# Altium PCB 1.PcbDoc
Units mm, origin at the board's own origin, x right, y up, seen from the top; angles counter-clockwise.
Board outline 161.25 x 84.75 mm, 2 copper layers (Top Layer, Bottom Layer); 59 components, 58 nets, 272 pads, 78 vias.
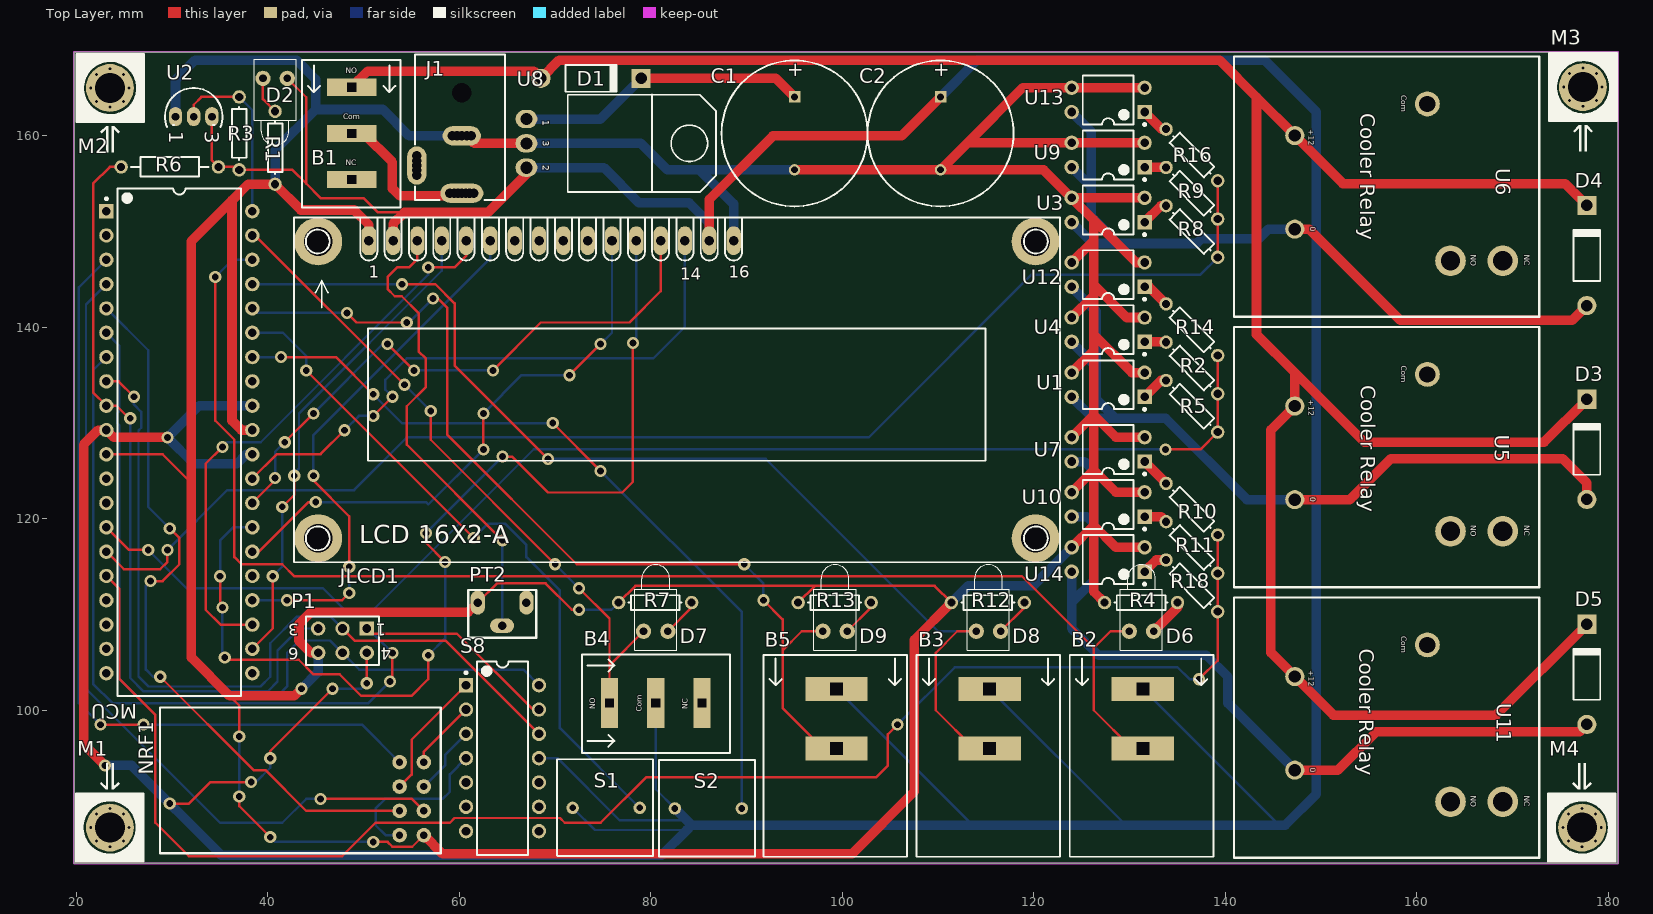
[diagram p0: Top Layer view]
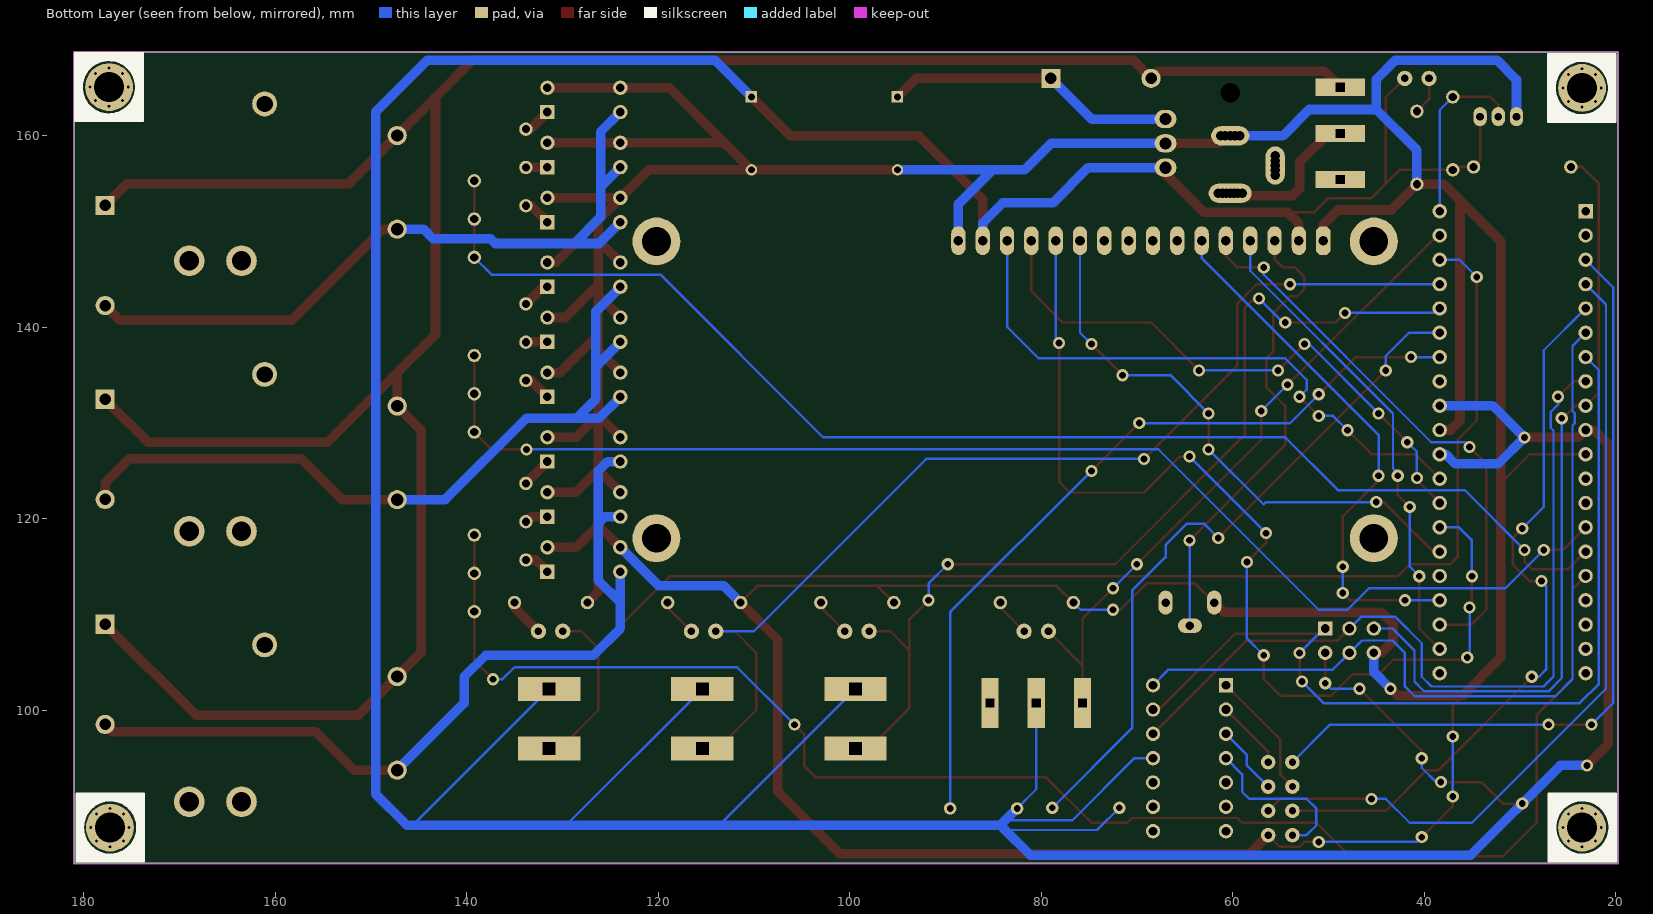
[diagram p1: Bottom Layer view, seen from below]

## Layer stack, top to bottom
Top Solder: solder mask 0.0102, Solder Resist, Dk 3.5
Top Layer: signal copper 0.0356
Dielectric 1: dielectric 0.32, FR-4, Dk 4.8
Bottom Layer: signal copper 0.0356
Bottom Solder: solder mask 0.0102, Solder Resist, Dk 3.5

## Board outline
19.75,84 19.75,168.75 181,168.75 181,84

## Design rules (kind name [scope] priority, off if disabled: settings)
Clearance [All] p1: gap=0.254 ignorepadtopadclearanceinfootprint=FALSE except(0: Arc-Hole Track-Hole SMDPad-Hole THPad-Hole Via-Hole Fill-Hole Poly-Hole Region-Hole Text-Hole)
PolygonConnect [All] p1: connectstyle=Relief reliefconductorwidth=0.254 reliefentries=4 polygonreliefangle="90 Angle" airgapwidth=0.254
RoutingVias [All] p1: holewidth=0.711 width=1.27 viastyle="Through Hole" minholewidth=0.711 minwidth=1.27 maxholewidth=0.711 maxwidth=1.27
SolderMaskExpansion [All] p1: expansion=0.102
Width [All] p1: maxlimit=1 minlimit=0.254 preferedwidth=0.254
30 further rules are at their usual default settings.

## Components (designator, comment, footprint, x,y, rotation, side; value= is the part's Value field where it differs from the comment)
B1 "Small Cooler Button" "Small cooler button" 48.877,161.774 r270 top
B2 "Cooler Button" "PCBComponent_1 - duplicate" 131.25,95.25 r270 top
B3 "Cooler Button" "PCBComponent_1 - duplicate" 115.25,95.25 r270 top
B4 "Small Cooler Button" "Small cooler button" 78.976,100.877 r0 top
B5 "Cooler Button" "PCBComponent_1 - duplicate" 99.25,95.25 r270 top
C1 "Cap Pol1" RB7.6-15 95,160.25 r90 top value=1mF
C2 "Cap Pol1" RB7.6-15 110.25,160.25 r90 top value=100uF
D1 "Diode 1N4004" DO-41 73.75,166 r0 top
D2 "LED1" LED-1 40.75,166 r270 top
D3 "Diode 1N4004" DO-41 177.75,127.25 r90 top
D4 "Diode 1N4004" DO-41 177.75,147.5 r90 top
D5 "Diode 1N4004" DO-41 177.75,103.75 r90 top
D6 "LED1" LED-1 131.23,108.25 r90 top
D7 "LED1" LED-1 80.5,108.25 r90 top
D8 "LED1" LED-1 115.25,108.25 r90 top
D9 "LED1" LED-1 99.23,108.25 r90 top
J1 "Power Jack" "Power Jack" 60.25,168.5 r270 top
JLCD1 "LCD2X16_Alphanumeric" LCD_2X16 80,132.75 r0 top
M1 "Screw" "Board Screw" 23.5,87.75 r180 top
M2 "Screw" "Board Screw" 23.5,165 r0 top
M3 "Screw" "Board Screw" 177.336,165.086 r0 top
M4 "Screw" "Board Screw" 177.25,87.75 r180 top
MCU "DIP Package" 40P6 30.75,128 r0 top
NRF1 "NRF24L01" PCBComponent_1#1 56.29,94.58 r0 top
P1 "Header 3X2A" HDR2X3_CEN 50.33,108.54 r180 top
PT2 "POT2" POT2 60.904,107.567 r0 top
R1 "Res1" AXIAL-0.3 40.75,158.75 r270 top value=1K
R2 "Res1" AXIAL-0.3 136.5,135.75 r135 top value=100
R3 "Res1" AXIAL-0.3 37,160.25 r90 top value=4.7K
R4 "Res1" AXIAL-0.3 131.19,111.25 r180 top value=1K
R5 "Res1" AXIAL-0.3 136.5,131.75 r135 top value=100
R6 "Res2" AXIAL-0.4 29.75,156.75 r180 top value=10K
R7 "Res1" AXIAL-0.3 80.44,111.25 r180 top value=1K
R8 "Res1" AXIAL-0.3 136.5,150 r135 top value=100
R9 "Res1" AXIAL-0.3 136.5,154 r135 top value=100
R10 "Res1" AXIAL-0.3 136.5,121 r135 top value=100
R11 "Res1" AXIAL-0.3 136.5,117 r135 top value=100
R12 "Res1" AXIAL-0.3 115.19,111.25 r180 top value=1K
R13 "Res1" AXIAL-0.3 99.19,111.25 r180 top value=1K
R14 "Res1" AXIAL-0.3 136.5,139.75 r135 top value=100
R16 "Res1" AXIAL-0.3 136.5,158 r135 top value=100
R18 "Res1" AXIAL-0.3 136.5,113 r135 top value=100
S1 "PushButton_2PIN" PushButton_2PIN 74.5,90 r0 top
S2 "PushButton_2PIN" PushButton_2PIN 85.167,89.94 r0 top
S8 "SW DIP-7" DIP-14 64.5,95 r0 top
U1 "Optoisolator1" DIP-4 127.75,134 r180 top
U2 "DS1820" DS1820 32.25,162 r270 top
U3 "Optoisolator1" DIP-4 127.75,152.25 r180 top
U4 "Optoisolator1" DIP-4 127.75,139.75 r180 top
U5 "Relay Cooler" PCBComponent_1#2 158.934,126.699 r270 top
U6 "Relay Cooler" PCBComponent_1#2 158.934,154.949 r270 top
U7 "Optoisolator1" DIP-4 127.75,127.25 r180 top
U8 "L7805CV" "78XXCV - Right" 67,159.21 r270 top
U9 "Optoisolator1" DIP-4 127.75,158 r180 top
U10 "Optoisolator1" DIP-4 127.75,121.5 r180 top
U11 "Relay Cooler" PCBComponent_1#2 158.934,98.449 r270 top
U12 "Optoisolator1" DIP-4 127.75,145.5 r180 top
U13 "Optoisolator1" DIP-4 127.75,163.75 r180 top
U14 "Optoisolator1" DIP-4 127.75,115.75 r180 top

## Footprints (in the part's own frame and the unit in brackets; to place one, negate y for a bottom-side part, rotate by r counter-clockwise, add the part's x,y. Pads: shape width x height; smd on the part's side, far side on the other; paste and mask are expansions set on the pad)
40P6 [mm] "40-Pin Ceramic Dual In-Line Package (CerDIP)"
  rect 1.5x1.5 hole 0.9: 1(-7.62,24.13)
  round 1.5 hole 0.9: 2(-7.62,21.59) 3(-7.62,19.05) 4(-7.62,16.51) 5(-7.62,13.97) 6(-7.62,11.43) 7(-7.62,8.89) 8(-7.62,6.35) 9(-7.62,3.81) 10(-7.62,1.27) 11(-7.62,-1.27) 12(-7.62,-3.81) 13(-7.62,-6.35) 14(-7.62,-8.89) 15(-7.62,-11.43) 16(-7.62,-13.97) 17(-7.62,-16.51) 18(-7.62,-19.05) 19(-7.62,-21.59) 20(-7.62,-24.13) 21(7.62,-24.13) 22(7.62,-21.59) 23(7.62,-19.05) 24(7.62,-16.51) 25(7.62,-13.97) 26(7.62,-11.43) 27(7.62,-8.89) 28(7.62,-6.35) 29(7.62,-3.81) 30(7.62,-1.27) 31(7.62,1.27) 32(7.62,3.81) 33(7.62,6.35) 34(7.62,8.89) 35(7.62,11.43) 36(7.62,13.97) 37(7.62,16.51) 38(7.62,19.05) 39(7.62,21.59) 40(7.62,24.13)
  silkscreen extent -7.74,-26.5 6.45,26.5, body extent -7.05,-26.47 7.05,26.47, height 4.83
"78XXCV - Right" [mil] "Right Angle"
  oval 75x90 hole 50: 1(-100,0) 2(100,0) 3(0,0)
  silkscreen extent -201,170 200,780, body extent -198,-8 202,776, height 175
AXIAL-0.3 [mm] "Axial Device, Thru-Hole; 2 Leads; 0.3 in Pin Spacing"
  round 1.4 hole 0.85: 1(-3.81,0) 2(3.81,0)
  silkscreen extent -2.77,-0.76 2.77,0.76
AXIAL-0.4 [mm] "Axial Device, Thru-Hole; 2 Leads; 0.4 in Pin Spacing"
  round 1.4 hole 0.85: 1(-5.08,0) 2(5.08,0)
  silkscreen extent -4.06,-1.02 4.06,1.02
"Board Screw" [mm]
  round 0.6 hole 0.3: S(-2,0) S(-1.414,1.414) S(-1.414,-1.414) S(0,2) S(0,-2) S(1.414,1.414) S(1.414,-1.414) S(2,0)
  round 5 hole 3.15 mask+0.1: S(0,0)
  silkscreen extent -3.49,-6.75 3.56,3.52
DIP-4 [mm] "DIP; 4 Leads; Row Spacing 7.62 mm; Pitch 2.54 mm"
  rect 1.5x1.5 hole 0.9: 1(-3.81,1.27)
  round 1.5 hole 0.9: 2(-3.81,-1.27) 3(3.81,-1.27) 4(3.81,1.27)
  silkscreen extent -3.94,-2.55 2.65,2.69, body extent -3.15,-2.5 3.15,2.5, height 5.6
DIP-14 [mm] "DIP; 14 Leads; Row Spacing 7.62 mm; Pitch 2.54 mm"
  rect 1.5x1.5 hole 0.9: 1(-3.81,7.62)
  round 1.5 hole 0.9: 2(-3.81,5.08) 3(-3.81,2.54) 4(-3.81,0) 5(-3.81,-2.54) 6(-3.81,-5.08) 7(-3.81,-7.62) 8(3.81,-7.62) 9(3.81,-5.08) 10(3.81,-2.54) 11(3.81,0) 12(3.81,2.54) 13(3.81,5.08) 14(3.81,7.62)
  silkscreen extent -3.93,-10.1 2.65,10.1, body extent -3.6,-10.1 3.6,10.1, height 5.08
DO-41 [mm] "Diode, Axial; Body 5.2 x 2.7 mm (LxDia. max), Lead Dia. 0.86 mm (max)"
  round 2 hole 1.2: 1(-5.23,0)
  rect 2x2 hole 1.2: 2(5.23,0)
  silkscreen extent -2.65,-1.4 2.75,1.4
DS1820 [mm]
  oval 2x1.4 hole 0.8: 1(0,-1.905) 2(0,0) 3(0,1.905)
  silkscreen extent -3,-3 1.09,3
HDR2X3_CEN [mm] "Connector; Header; 3x2 Position"
  rect 1.5x1.5 hole 0.9: 1(0,0)
  round 1.5 hole 0.9: 2(2.54,0) 3(5.08,0) 4(0,2.54) 5(2.54,2.54) 6(5.08,2.54)
  silkscreen extent -1.27,-1.27 6.35,3.81
LCD_2X16 [mm] "LCD"
  oct 1.5x3 hole 1: 1(-29.464,16.3)
  oval 1.5x3 hole 1: 2(-26.924,16.3) 3(-24.384,16.3) 4(-21.844,16.3) 5(-19.304,16.3) 6(-16.764,16.3) 7(-14.224,16.3) 8(-11.684,16.3) 9(-9.144,16.3) 10(-6.604,16.3) 11(-4.064,16.3) 12(-1.524,16.3) 13(1.016,16.3) 14(3.556,16.3) 15(6.096,16.3) 16(8.636,16.3)
  round 5 hole 3: ""(-34.756,-14.775) ""(-34.756,16.213) ""(40.174,-14.775) ""(40.174,16.213)
  silkscreen extent -37.3,-17.29 42.7,18.71, body extent -37.35,-17.3 42.65,18.7, height 11.5
LED-1 [mm] "LED; 2 Leads"
  round 1.6 hole 0.8: 1(0,1.27) 2(0,-1.27)
  silkscreen extent -2,-2.2 6.95,2.2
PCBComponent_1#1 [mil]
  round 60 hole 30: CE(0,-200) CSN(-100,-200) GND(0,-300) IRQ(-100,0) MISO(0,0) MOSI(-100,-100) SCK(0,-100) VCC(-100,-300)
  silkscreen extent -1085,-375 70,225, body extent -1082,-365 60,225, height 138
PCBComponent_1#2 [mil]
  round 78.74 hole 51.18: 20(-200,-460) 21(185,-460)
  round 125.98 hole 78.74: 22(315,180) 23(315,395)
  round 102.36 hole 66.93: 24(-330,85)
  silkscreen extent -525,-710 545,546
"PCBComponent_1 - duplicate" [mm]
  rect 2.5x6.5 hole 1.3 square: 25(-0.762,0.127) 26(-6.985,0.127)
  silkscreen extent -10.54,-7.51 10.54,7.49
POT2 [mm]
  oval 1.5x2.5 hole 0.9: 1(1.016,3.683) 2(6.096,3.683)
  oval 2.5x1.5 hole 0.9: 3(3.556,1.27)
  silkscreen extent 0,0 7.11,5
"Power Jack" [mm] "Power Adaptor Jack"
  round 1.5 hole 1: 1(14.5,-1.25) 1(14.5,-0.8) 1(14.5,-0.4) 1(14.5,0.4) 1(14.5,0.8) 1(14.5,1.25) 2(8.5,-1) 2(8.5,1) 2(8.5,-0.5) 2(8.5,0.5) 3(10.6,-4.7) 3(11.1,-4.7) 3(12.1,-4.7) 3(12.6,-4.7)
  oval 2x4.5 hole 1: 1(14.5,0)
  oval 2x4 hole 1: 2(8.5,0)
  oval 4x2 hole 1: 3(11.6,-4.7)
  round 1.9 hole 2: MH(4,0)
  silkscreen extent 0,-4.9 15.2,4.5, body extent 0,-4.9 15.2,4.5, height 11
PushButton_2PIN [mm]
  round 1.3 hole 0.7: 1(-2.667,-0.191) 2(4.333,-0.191)
  silkscreen extent -4.32,-5.22 5.71,4.89
RB7.6-15 [mm] "Polarized Capacitor (Radial); 2 Leads"
  rect 1.2x1.2 hole 0.7: 1(3.81,0)
  round 1.2 hole 0.7: 2(-3.81,0)
  silkscreen extent -7.62,-7.62 7.62,7.62
"Small cooler button" [mm]
  rect 1.8x5.2 hole 0.9 square: 1(1.524,-0.127) 2(6.35,-0.127) 3(-3.302,-0.127)
  silkscreen extent -6.16,-5.35 9.27,4.97

## Part data
B2 B3 B5: "Button"
C1 C2: "Polarized Capacitor (Radial)", LatestRevisionDate=17-Jul-2002, LatestRevisionNote="Re-released for DXP Platform.", PackageDescription="Polarized Capacitor (Radial); 2 Leads", PackageReference=RB7.6-15, Published=8-Jun-2000, Publisher="Altium Limited"
D1 D3 D4 D5: "1 Amp General Purpose Rectifier", Code_JEDEC=DO-204-AL, ComponentLink1Description="Manufacturer Link", ComponentLink1URL=http://www.fairchildsemi.com/, ComponentLink2Description=Datasheet, ComponentLink2URL=http://www.fairchildsemi.com/ds/1N%2F1N4001.pdf, DatasheetVersion=1998, LatestRevisionDate=17-Jul-2002, LatestRevisionNote="Re-released for DXP Platform.", PackageDescription="Diode, Axial; Body 5.2 x 2.7 mm (LxDia. max), Lead Dia. 0.86 mm (max)", PackageReference=DO-41, PackageVersion=Aug-1999, Published=8-Jun-2000, Publisher="Altium Limited"
D2 D6 D7 D8 D9: "Typical RED GaAs LED", LatestRevisionDate=08-Jul-2005, LatestRevisionNote="Mech Layer 1 removed.", PackageDescription="LED; 2 Leads", PackageReference=LED-1, Published=8-Jun-2000, Publisher="Altium Limited"
M1 M2 M3 M4: library part "Board Screw", "Board Screw With Spacer"
MCU: library part ATmega32A-PU, "8-bit AVR Microcontroller, 2.7-5.5V, 16MHz, 32KB Flash, 1KB EEPROM, 2KB SRAM, 40-pin PDIP, Industrial Grade (-40°C to 85°C)", Code_JEDEC=MS-011-AC, ComponentLink1Description="Manufacturer URL", ComponentLink1URL=http://www.atmel.com/, ComponentLink2Description="ATmega32A Datasheet", ComponentLink2URL=http://www.atmel.com/dyn/resources/prod_documents/doc8155.pdf, ComponentLink3Description="ATmega32A Summary", ComponentLink3URL=http://www.atmel.com/dyn/resources/prod_documents/8155S.pdf, DatasheetVersion="revC, Feb-2011", PackageDescription="40-lead (0.600\"/15.24mm Wide) Plastic Dual Inline Package (PDIP)", PackageReference=40P6, PackageVersion="revB, Sep-2001"
P1: "Header, 3-Pin, Dual row", LatestRevisionDate=17-Jul-2002, LatestRevisionNote="Re-released for DXP Platform.", Publisher="Altium Limited"
PT2: "Variable Potentiometer standing", Designer="Seyed Mohsen Ghasemian", WEB=www.picpars.com
R1 R2 R3 R4 R5 R6 R7 R8 R9 R10 R11 R12 R13 R14 R16 R18: "Resistor", LatestRevisionDate=17-Jul-2002, LatestRevisionNote="Re-released for DXP Platform.", Published=8-Jun-2000, Publisher="Altium Limited"
  R1 R2 R3 R4 R5 R7 R8 R9 R10 R11 R12 R13 R14 R16 R18: PackageDescription="Axial Device, Thru-Hole; 2 Leads; 0.3 in Pin Spacing", PackageReference=AXIAL-0.3
  R6: PackageDescription="Axial Device, Thru-Hole; 2 Leads; 0.4 in Pin Spacing", PackageReference=AXIAL-0.4
S8: "DIP Switch, 7 Position, SPST", Code_JEDEC=MO-001-AF, LatestRevisionDate=17-Jul-2002, LatestRevisionNote="Re-released for DXP Platform.", PackageReference=DIP-14, Published=24-Mar-1999, Publisher="Altium Limited"
U1 U3 U4 U7 U9 U10 U12 U13 U14: "4-Pin Phototransistor Optocoupler", DatasheetVersion=Nov-2003, LatestRevisionDate=04-Mar-2005, LatestRevisionNote="Sch pins 3 & 4 Swapped.", PackageReference=DIP-4, Published=24-Mar-1999, Publisher="Altium Limited"
U2: "1-Wire Digital Thermometer", ComponentAvailability=Obsolete, ComponentLink1Description="Manufacturer Link", ComponentLink1URL=http://www.maxim-ic.com/, ComponentLink2Description=Datasheet, ComponentLink2URL=http://pdfserv.maxim-ic.com/en/ds/DS1820-DS1820S.pdf, ComponentLink3Description="Discontinuation Notice", ComponentLink3URL=http://www.maxim-ic.com/qa/pdfs/non-obsolescence-letter.pdf, DatasheetVersion=5-Mar-1998, LatestRevisionDate=17-Jul-2002, LatestRevisionNote="Re-released for DXP Platform.", PackageDescription="TO, Flat Index; 3 In-Line, Axial Leads; Body Dia. 4.6mm; Leads 0.56 x 0.51 mm (max)", PackageReference=PR35, PackageVersion=1999, Published=13-Oct-2000, Publisher="Altium Limited"
U8: library part L78XXCV, "Fixed Voltage Regulator", Adding Date=1387/01/06, Company=ControTec, Designer="Saeid Jorablo"
J1: Adding Date=10/21/2009, Company=Personal, Designer="Saeid Jorablo", Project Name=Laser

## Via types
v1: diameter 1.27, hole 0.711, Top Layer to Bottom Layer, 78 vias

## Nets (pads, with @x,y where several pads share a name; then routed paths per layer and width w, separated by ;. In a path a pad name is that pad's centre, name@x,y a point inside that pad or via, vN(x,y) a via of type N, cw(c..) or ccw(c..) an arc to the next point about the centre after c; other vN are vias at no path point)
12: B1.3 D1.1 D3.2 D4.2 D5.2 U5.20 U6.20 U11.20 | length 272.8
  Top Layer w1: B1.3 50.424,166.75 67.77,166.75 D1.1 70.416,167.896 139.383,167.896 143.25,164.029 ; D5.2 168.27,99.5 151.279,99.5 U11.20 144.75,106.029 144.75,129.279 U5.20 147.25,135.25 ; D3.2 173.27,128 154.5,128 147.25,135.25 ; D4.2 175.48,155 152.279,155 U6.20 143.25,164.029 ; 143.25,164.029 143.25,139.25 147.25,135.25
A1: B4.3 D7.1 MCU.39 | length 69.5
  Top Layer w0.254: MCU.39 38.66,149.59 v1(54.25,134) ; v1(57,131.25) 57,128.25 v1(70,115.25) ; v1(72.5,112.75) 75.674,109.576 75.674,104.694 ; B4.3 75.674,104.694 ; D7.1 75.674,104.694
  Bottom Layer w0.254: v1(54.25,134) v1(57,131.25) ; v1(70,115.25) v1(72.5,112.75)
A2: B2.25 D6.1 MCU.38 | length 146.1
  Top Layer w0.254: v1(34.5,145.25) 34.5,130.25 36.5,128.25 36.5,116 37.25,115.25 41.5,115.25 42.766,113.984 48.921,113.984 48.937,114 118.75,114 126.25,106.5 ; D6.1 128,108.25 126.25,106.5 ; B2.25 130.238,96.012 126.25,100 126.25,106.5
  Bottom Layer w0.254: v1(34.5,145.25) 36.3,147.05 MCU.38
A3: B3.25 D8.1 MCU.37 | length 112.9
  Top Layer w0.254: v1(54,144.5) 57.5,144.5 59.5,142.5 59.5,136 v1(69.25,126.25) ; D8.1 112,108.25 109.75,106 109.75,100 113.738,96.012 B3.25
  Bottom Layer w0.254: MCU.37 38.38,144.5 v1(54,144.5) ; v1(69.25,126.25) 92,126.25 110,108.25 D8.1
A4: B5.25 D9.1 MCU.36 | length 101.4
  Top Layer w0.254: v1(48.25,141.5) 49.25,140.5 v1(54.5,140.5) ; v1(57.25,143) 57.75,143 58.75,142 58.75,128.75 72.25,115.25 v1(89.75,115.25) ; v1(91.75,111.5) 93.75,109.5 93.75,106.25 ; D9.1 95.75,108.25 93.75,106.25 ; B5.25 97.988,96.012 93.75,100.25 93.75,106.25
  Bottom Layer w0.254: MCU.36 38.84,141.5 v1(48.25,141.5) ; v1(54.5,140.5) 54.75,140.5 v1(57.25,143) ; v1(89.75,115.25) 91.75,113.25 v1(91.75,111.5)
A5: MCU.35 S1.2 | length 72.3
  Top Layer w0.254: v1(44,135.5) v1(61.5,118)
  Bottom Layer w0.254: MCU.35 41.57,139.43 44,137 v1(44,135.5) ; v1(61.5,118) 63,119.5 64.75,119.5 67,117.25 67,116 70.5,112.5 70.5,98.143 S1.2
A6: MCU.34 S2.2 | length 82.7
  Top Layer w0.254: v1(41.36,136.89) 47.11,136.89 v1(51,133) ; v1(69.75,130) v1(74.75,125)
  Bottom Layer w0.254: MCU.34 v1(41.36,136.89) ; v1(51,133) 54.016,129.984 69.734,129.984 v1(69.75,130) ; v1(74.75,125) 89.5,110.25 S2.2
A7: MCU.33
B2: MCU.3 NRF1.IRQ | length 83.5
  Top Layer w0.254: v1(22.5,98.5) v1(27,98.5)
  Bottom Layer w0.254: v1(22.5,98.5) 20.25,100.75 20.25,144.17 MCU.3 ; v1(27,98.5) 49.83,98.5 NRF1.IRQ
B3: MCU.4 NRF1.CE | length 85.8
  Top Layer w0.254: v1(45.5,90.75) 55.04,90.75 NRF1.CE
  Bottom Layer w0.254: MCU.4 21,142.38 21,102.25 35,88.25 41.5,88.25 44,90.75 v1(45.5,90.75)
C0: JLCD1.4 MCU.22 | length 50.8
  Top Layer w0.254: MCU.22 40.5,108.54 v1(40.5,114) ; v1(41.5,121.25) 42.75,122.5 v1(42.75,124.5)
  Bottom Layer w0.254: v1(40.5,114) 41.5,115 v1(41.5,121.25) ; v1(42.75,124.5) 42.75,124.75 43.25,125.25 43.25,131 58.156,145.906 JLCD1.4
C1: JLCD1.5 MCU.23 | length 59
  Top Layer w0.254: v1(35.25,127.5) 33.5,125.75 33.5,110.5 35.05,108.95 MCU.23 ; v1(56.75,146.25) 59.5,146.25 60.696,147.446 JLCD1.5
  Bottom Layer w0.254: v1(35.25,127.5) 35.75,128 39.25,128 56.75,145.5 v1(56.75,146.25)
C2: JLCD1.6 MCU.24 | length 56.5
  Top Layer w0.254: v1(42,111.5) 47.75,111.5 v1(48.5,112.25) ; v1(44.75,124.5) 44.75,124 48.5,120.25 v1(48.5,115)
  Bottom Layer w0.254: MCU.24 38.38,111.5 v1(42,111.5) ; v1(44.75,124.5) 44.75,128.75 63.236,147.236 JLCD1.6 ; v1(48.5,112.25) v1(48.5,115)
C3: MCU.25
C4: JLCD1.11 MCU.26 | length 59.1
  Top Layer w0.254: MCU.26 39.07,116.57 44.25,121.75 v1(45,121.75) ; v1(62.5,127.25) v1(62.5,131) ; v1(71.5,135) v1(74.75,138.25)
  Bottom Layer w0.254: v1(45,121.75) 56.5,121.75 56.75,121.5 v1(62.5,127.25) ; v1(62.5,131) 66.5,135 v1(71.5,135) ; v1(74.75,138.25) 75.936,139.436 JLCD1.11
C5: JLCD1.12 MCU.27 | length 109.1
  Top Layer w0.254: v1(35,114) 35,111 v1(35.25,110.75) ; v1(35.5,105.5) 35.721,105.279 43.221,105.279 44.75,103.75 47.5,103.75 49.75,101.5 55,101.5 56.75,103.25 v1(56.75,105.75) ; v1(56.5,118.5) 56.5,117.5 v1(58.5,115.5) ; v1(64.5,126.5) 65.5,126.5 69.25,122.75 77,122.75 78.125,123.875 v1(78.125,138.375)
  Bottom Layer w0.254: v1(35,114) 35,117.75 36.36,119.11 MCU.27 ; v1(35.25,110.75) 35.25,105.75 v1(35.5,105.5) ; v1(56.5,118.5) v1(64.5,126.5) ; v1(56.75,105.75) 58.5,107.5 v1(58.5,115.5) ; v1(78.125,138.375) 78.476,138.726 JLCD1.12
C6: JLCD1.13 MCU.28 | length 61.1
  Top Layer w0.254: MCU.28 40.75,124.03 v1(40.75,124.25) ; v1(41.75,128) v1(44.75,131) ; v1(52.5,138.25) v1(55.25,135.5) ; v1(63.5,135.5) 68.5,140.5 77.75,140.5 81.016,143.766 JLCD1.13
  Bottom Layer w0.254: v1(40.75,124.25) 40.75,127 v1(41.75,128) ; v1(44.75,131) 52,138.25 v1(52.5,138.25) ; v1(55.25,135.5) v1(63.5,135.5)
C7: JLCD1.14 MCU.29 | length 62.8
  Top Layer w0.254: MCU.29 40.93,126.75 45.5,126.75 v1(48,129.25) ; v1(51,130.75) v1(53,132.75)
  Bottom Layer w0.254: v1(48,129.25) 49.5,130.75 v1(51,130.75) ; v1(53,132.75) 52.25,133.5 52.25,134.5 54.5,136.75 80.25,136.75 83.556,140.056 JLCD1.14
D0: MCU.14 R2.1 R5.1 R14.1 | length 135.3
  Top Layer w0.254: MCU.14 25.49,116.75 v1(27.5,116.75) ; v1(133.75,127.25) 137.388,127.25 R5.1 R2.1 R14.1
  Bottom Layer w0.254: v1(27.5,116.75) 31.5,112.75 45.75,112.75 48,110.5 51,110.5 67.766,127.266 133.734,127.266 v1(133.75,127.25)
D1: MCU.15 R8.1 R9.1 R16.1 | length 139
  Top Layer w0.254: MCU.15 24.95,114.75 28.75,114.75 29.5,115.5 v1(29.5,116.75) ; R8.1 R9.1 R16.1
  Bottom Layer w0.254: v1(29.5,116.75) 35.75,123 49,123 54.5,128.5 102.75,128.5 119.75,145.5 137.388,145.5 R8.1
D2: MCU.16 R10.1 R11.1 R18.1 | length 165.2
  Top Layer w0.254: MCU.16 24.5,112.66 24.5,103.25 28.25,99.5 28.25,88.25 31.75,84.75 47.75,84.75 51.25,88.25 59,88.25 59.5,88.75 70.5,88.75 71,88.25 74.75,88.25 79.5,93 103.5,93 104.75,94.25 104.75,97.5 v1(105.75,98.5) ; v1(137.25,103.25) 139.194,105.194 R18.1 R11.1 R10.1
  Bottom Layer w0.254: v1(105.75,98.5) 111.75,104.5 135,104.5 136.25,103.25 v1(137.25,103.25)
D3: MCU.17
D4: MCU.18
D5: MCU.19
D6: MCU.20
D7: MCU.21
GND: C1.2 C2.2 J1.2 JLCD1.1 JLCD1.16 MCU.11 MCU.31 NRF1.GND P1.6 PT2.1 R1.2 R4.2 R7.2 R12.2 R13.2 U1.2 U1.3 U2.1 U3.2 U3.3 U4.2 U4.3 U7.2 U7.3 U8.3 U9.2 U9.3 U10.2 U10.3 U12.2 U12.3 U13.2 U13.3 U14.2 U14.3 | length 603.9
  Top Layer w0.254: MCU.11 29.02,126.73 32,123.75 ; 36,101.5 37,100.5 v1(37,97.25) ; v1(37,91) 37,90 v1(40.25,86.75) ; v1(51,86.25) 52.5,86.25 53,85.75 55.08,85.75 NRF1.GND ; PT2.1 63.92,113.25 69,113.25 71.75,110.5 v1(72.5,110.5) ; R7.2 78.38,113 97.13,113 ; R13.2 97.13,113 ; R12.2 109.63,113 97.13,113
  Top Layer w1: MCU.31 37.23,129.27 36.25,130.25 36.25,153.25 ; v1(43.5,102.25) 42.75,101.5 36,101.5 32,105.5 32,123.75 32,149 36.25,153.25 ; P1.6 44.5,106 43.25,107.25 43.25,109 44.5,110.25 60.92,110.25 PT2.1 ; JLCD1.1 50.536,150.714 49,152.25 43.44,152.25 R1.2 37.94,154.94 36.25,153.25 ; NRF1.GND 58.25,85 101,85 107.5,91.5 107.5,107.37 R12.2 ; J1.2@60.75,160 61.54,159.21 U8.3 ; C1.2 C2.2 ; U14.3 126.25,119.33 ; U10.3 126.25,125.08 ; U7.3 126.25,130.83 ; U1.3 126.25,137.58 ; U4.3 126.25,143.33 ; U12.3 126.25,149.08 ; R4.2 126.25,112.38 126.25,119.33 ; U14.2 128.56,117.02 126.25,119.33 ; U10.2 128.56,122.77 126.25,125.08 ; U7.2 128.56,128.52 126.25,130.83 ; U1.2 130.23,135.27 126.25,139.25 ; U4.2 129.69,141.02 126.25,144.46 ; U12.2 130.69,146.77 126.25,151.21 ; U3.2 U3.3 ; U9.2 U9.3 113.08,159.27 ; U13.2 U13.3 118.83,165.02 113.08,159.27 ; C2.2 113.08,159.27 ; C2.2 121.02,156.44 U3.3 ; U3.3 126.25,151.21 ; 126.25,119.33 126.25,125.08 ; 126.25,125.08 126.25,130.83 ; 126.25,130.83 126.25,137.58 ; 126.25,137.58 126.25,139.25 ; 126.25,139.25 126.25,143.33 ; 126.25,143.33 126.25,144.46 ; 126.25,144.46 126.25,149.08 ; 126.25,149.08 126.25,151.21
  Bottom Layer w0.254: v1(37,91) v1(37,97.25) ; v1(40.25,86.75) 40.75,86.25 v1(51,86.25) ; v1(72.5,110.5) 75.88,110.5 R7.2
  Bottom Layer w1: U2.1 30.345,165.845 32.396,167.896 43,167.896 45,165.896 45,162.75 ; R1.2 40.75,158.5 45,162.75 ; v1(43.5,102.25) 45.25,104 P1.6 ; J1.2@60.75,160 59.75,160 54.75,160 52,162.75 45,162.75 ; U8.3 78.96,159.21 81.73,156.44 85.082,156.44 ; JLCD1.16 88.636,152.886 85.082,156.44 ; C1.2 85.082,156.44 ; R12.2 113.13,113 119.92,113 U14.3
MISO: MCU.7 P1.1 S8.13 | length 95.8
  Top Layer w0.254: P1.1 50.87,108 59.75,108 67.67,100.08 S8.13 ; v1(52.75,103) 53,103.25 v1(53,106)
  Bottom Layer w0.254: MCU.7 21.75,135.51 21.75,102.75 23.75,100.75 50.5,100.75 v1(52.75,103) ; P1.1 50.46,108.54 v1(53,106)
MOSI: MCU.6 P1.5 S8.14 | length 87.9
  Bottom Layer w0.254: MCU.6 24.5,138.06 24.5,131.25 24.25,131 24.25,130 24.5,129.75 24.5,103.25 26.282,101.468 40.968,101.468 42,102.5 42,106 43.29,107.29 46.5,107.29 P1.5 49.54,104.25 66.68,104.25 S8.14
N_MISO: NRF1.MISO S8.2 | length 7.3
  Top Layer w0.254: NRF1.MISO 56.29,95.68 S8.2
N_MOSI: NRF1.MOSI S8.1 | length 13.7
  Top Layer w0.254: NRF1.MOSI 55,93.29 55,96.93 S8.1
  Bottom Layer w0.254: NRF1.MOSI NRF1.MOSI@54.04,92.04
N_SCK: NRF1.SCK S8.3 | length 7.3
  Bottom Layer w0.254: NRF1.SCK 58.5,94.25 58.5,95.35 S8.3
N_VCC: NRF1.VCC S8.4 | length 17.4
  Bottom Layer w0.254: NRF1.VCC 52.29,86.96 51.25,88 51.25,89.75 52.25,90.75 58.25,90.75 59,91.5 59,93.31 S8.4
NetB1_1: B1.1 J1.1 | length 15.5
  Top Layer w1: B1.1 50,160.25 53,157.25 53,154.5 53.75,153.75 58.75,153.75 59,154 59.45,154 J1.1@59.85,154
NetC1_1: C1.1 D1.2 U8.1 | length 30.6
  Top Layer w1: D1.2 93.06,166 C1.1
  Bottom Layer w1: U8.1 74.73,161.75 D1.2
NetD2_2: D2.2 R1.1 | length 4
  Top Layer w0.254: D2.2 39.48,163.83 R1.1
NetD3_1: D3.1 U1.4 U4.4 U5.21 U12.4 | length 82
  Top Layer w1: U5.21 153,122 157.25,126.25 175.25,126.25 177.75,123.75 D3.1
  Bottom Layer w1: U1.4 126.17,130.5 128.5,130.5 ; U4.4 126.5,135.92 ; U12.4 126.5,141.67 126.5,135.92 ; U5.21 142.25,122 133.75,130.5 128.5,130.5 ; 126.5,135.92 126.5,132.5 128.5,130.5
NetD4_1: D4.1 U3.4 U6.21 U9.4 U13.4 | length 78.6
  Top Layer w1: U6.21 148.75,150.25 158.25,140.75 176.23,140.75 D4.1
  Bottom Layer w1: U3.4 126.17,148.75 128.75,148.75 ; U9.4 126,154.67 ; U13.4 126,160.42 126,154.67 ; U6.21 144.5,150.25 143.5,149.25 137.5,149.25 137,148.75 128.75,148.75 ; 126,154.67 126,151.5 128.75,148.75
NetD5_1: D5.1 U7.4 U10.4 U11.21 U14.4 | length 89.5
  Top Layer w1: U11.21 151.75,93.75 155.75,97.75 176.98,97.75 D5.1
  Bottom Layer w1: U14.4 123.94,111.25 ; U10.4 125.52,120.23 126.25,119.5 ; U7.4 125.27,125.98 126.25,125 126.25,119.5 ; U11.21 140.25,100.75 140.25,103.5 138,105.75 126.75,105.75 123.94,108.56 123.94,111.25 ; 123.94,111.25 126.25,113.56 126.25,119.5
NetD6_2: D6.2 R4.1 | length 4
  Top Layer w1: D6.2 135,110.75 R4.1
NetD7_2: D7.2 R7.1 | length 4
  Top Layer w0.254: D7.2 84.25,110.73 R7.1
NetD8_2: D8.2 R12.1 | length 4
  Top Layer w0.254: D8.2 119,110.73 R12.1
NetD9_2: D9.2 R13.1 | length 4
  Top Layer w0.254: D9.2 103,110.75 R13.1
NetMCU_40: MCU.40 R3.2 U2.2 | length 18.8
  Top Layer w0.254: U2.2 32.25,163.25 33.06,164.06 R3.2
  Bottom Layer w0.254: R3.2 38.37,162.69 MCU.40
NetR2_2: R2.2 U4.1 | length 2.3
  Top Layer w1: U4.1 133.77,138.48 R2.2
NetR5_2: R5.2 U1.1 | length 3
  Top Layer w1: U1.1 133.274,134.444 R5.2
NetR8_2: R8.2 U3.1 | length 3
  Top Layer w1: U3.1 133.274,152.694 R8.2
NetR9_2: R9.2 U9.1 | length 2.3
  Top Layer w1: U9.1 133.77,156.73 R9.2
NetR10_2: R10.2 U7.1 | length 3.2
  Top Layer w1: U7.1 133.806,123.734 R10.2
NetR11_2: R11.2 U10.1 | length 2.5
  Top Layer w1: U10.1 133.27,120.23 R11.2
NetR14_2: R14.2 U12.1 | length 3
  Top Layer w1: U12.1 132.02,144.23 R14.2
NetR16_2: R16.2 U13.1 | length 3
  Top Layer w1: U13.1 133.346,160.694 R16.2
NetR18_2: R18.2 U14.1 | length 2.7
  Top Layer w1: U14.1 132.774,115.694 R18.2
POT: JLCD1.3 PT2.3 | length 49.3
  Top Layer w0.254: JLCD1.3 55.616,147.116 54.75,146.25 53.5,146.25 52.5,145.25 52.5,144 53.25,143.25 53.982,143.25 55.741,141.491 55.741,137.491 56.5,136.732 56.5,133.75 54.5,131.75 54.5,127.75 v1(64.5,117.75)
  Bottom Layer w0.254: PT2.3 v1@64.46,117.71
RST: MCU.9 P1.3 R6.2 | length 82.4
  Top Layer w0.254: R6.2 23.5,156.75 21.75,155 21.75,133.19 MCU.9 24.19,131.81 25.5,130.5 v1(25.625,130.5)
  Bottom Layer w0.254: v1(25.625,130.5) 25.625,103.375 27.024,101.976 39.976,101.976 41,103 41,106.25 43.29,108.54 P1.3
SCK: MCU.8 P1.2 S8.12 | length 85.6
  Top Layer w0.254: MCU.8 24.4,134.35 v1(26,132.75) ; P1.2 49.08,107.25 58.6,107.25 S8.12
  Bottom Layer w0.254: v1(26,132.75) 26,131.937 26.766,131.171 26.766,129.516 26.484,129.234 26.484,103.516 27.516,102.484 39.234,102.484 40.25,103.5 40.25,107 43,109.75 46.58,109.75 P1.2
SS: MCU.5 NRF1.CSN | length 75.7
  Top Layer w0.254: v1(27.75,113.5) 29,113.5 30.75,115.25 30.75,118 v1(29.75,119) ; v1(28.75,103.5) 38.5,93.75 39.75,93.75 44,89.5 NRF1.CSN
  Bottom Layer w0.254: MCU.5 27.5,137.6 27.5,121.25 v1(29.75,119) ; v1(27.75,113.5) 27.25,113 27.25,104.25 28,103.5 v1(28.75,103.5)
VCC: B2.26 B3.26 B4.1 B5.26 C2.1 D2.1 JLCD1.2 JLCD1.15 MCU.10 MCU.30 MCU.32 P1.4 R3.1 R6.1 S1.1 S2.1 S8.11 U2.3 U8.2 | length 561.1
  Top Layer w0.254: v1(29.75,90.25) 31.75,90.25 34,92.5 v1(38.25,92.5) ; U2.3 34.155,157.425 R6.1 36.69,156.75 R3.1 42.56,156.44 44,155 ; v1(40.25,95) 40.25,95.75 v1(46.75,102.25) ; D2.1 44,164.02 44,155 ; v1(50.33,102.83) P1.4 ; 54.25,152 51.5,152 50,153.5 45.5,153.5 44,155
  Top Layer w1: v1(23,94.25) 20.75,96.5 20.75,127.75 22.27,129.27 MCU.10 23.9,128.5 v1(29.5,128.5) ; JLCD1.2 53.076,150.826 54.25,152 63,152 67,156 U8.2 ; JLCD1.15 86.096,153.346 92.75,160 106.19,160 C2.1
  Bottom Layer w0.254: v1(38.25,92.5) 38.75,92.5 40.25,94 v1(40.25,95) ; v1(46.75,102.25) 49.75,102.25 v1(50.33,102.83) ; S8.11 70.25,95 76.75,88.5 83.75,88.5 ; S1.1 74.143,87.5 83.75,87.5 ; B4.1 80.5,91.75 S2.1 ; B5.26 113.5,88.112 113.5,88 ; B3.26 129.612,88 129.75,88 ; B2.26 145.5,88.112
  Bottom Layer w1: v1(23,94.25) 25.75,94.25 35.139,84.861 81.111,84.861 83.75,87.5 84.25,88 ; MCU.30 37.73,126.73 36.75,125.75 32.25,125.75 v1(29.5,128.5) 32.81,131.81 MCU.32 ; U8.2 75.08,156.67 78.75,153 84,153 86.096,150.904 JLCD1.15 ; S2.1 83.75,88.5 84.25,88 ; C2.1 114.086,167.896 144.104,167.896 149.5,162.5 149.5,91.25 146.25,88 129.75,88 ; 129.612,88 113.5,88 84.25,88
pads on no net: B1.2 B4.2 J1.3 J1.MH JLCD1. JLCD1.7 JLCD1.8 JLCD1.9 JLCD1.10 M1.S M2.S M3.S M4.S MCU.1 MCU.2 MCU.12 MCU.13 PT2.2 S8.5 S8.6 S8.7 S8.8 S8.9 S8.10 U5.22 U5.23 U5.24 U6.22 U6.23 U6.24 U11.22 U11.23 U11.24

## Keep-outs
Keep-Out Layer:
  the board outline again, w0.2

## Text inside footprints (layer, text, board x,y; h text height)
B1: Top Overlay "Com" at 47.861,161.52 h1; Top Overlay "NC" at 48.115,156.694 h1; Top Overlay "NO" at 48.115,166.346 h1
B4: Top Overlay "Com" at 79.23,99.861 h1 r90; Top Overlay "NC" at 84.056,100.115 h1 r90; Top Overlay "NO" at 74.404,100.115 h1 r90
C1: Top Overlay "+" at 95.75,166 h1.5 r90
C2: Top Overlay "+" at 111,166 h1.5 r90
JLCD1: Top Overlay "14" at 83.048,144.942 h1.27; Top Overlay "1" at 50.536,145.196 h1.27; Top Overlay "16" at 88.128,145.196 h1.27; Top Overlay "LCD 16X2-A" at 49.562,117.467 h1.91
P1: Top Overlay "6" at 43.218,106.508 h1.27 r180; Top Overlay "3" at 43.218,109.048 h1.27 r180; Top Overlay "1" at 52.362,109.048 h1.27 r180; Top Overlay "4" at 52.87,106.508 h1.27 r180
U2: Top Overlay "1" at 29.71,160.476 h1.5 r270; Top Overlay "3" at 33.393,160.476 h1.5 r270
U5: Top Overlay "+12" at 148.52,132.414 h1 r270; Top Overlay "0" at 148.647,122.254 h1 r270; Top Overlay "Com" at 158.172,135.97 h1 r270; Top Overlay "NO" at 165.411,119.333 h1 r270; Top Overlay "NC" at 170.999,119.333 h1 r270; Top Overlay "Cooler Relay" at 154.133,133.938 h1.52 r270
U6: Top Overlay "+12" at 148.52,160.664 h1 r270; Top Overlay "0" at 148.647,150.504 h1 r270; Top Overlay "Com" at 158.172,164.22 h1 r270; Top Overlay "NO" at 165.411,147.583 h1 r270; Top Overlay "NC" at 170.999,147.583 h1 r270; Top Overlay "Cooler Relay" at 154.093,162.331 h1.52 r270
U8: Top Overlay "1" at 68.7,161.623 h0.7 r270; Top Overlay "2" at 68.7,156.899 h0.7 r270; Top Overlay "3" at 68.7,159.464 h0.7 r270
U11: Top Overlay "+12" at 148.52,104.164 h1 r270; Top Overlay "0" at 148.647,94.004 h1 r270; Top Overlay "Com" at 158.172,107.72 h1 r270; Top Overlay "NO" at 165.411,91.083 h1 r270; Top Overlay "NC" at 170.999,91.083 h1 r270; Top Overlay "Cooler Relay" at 153.967,106.448 h1.52 r270